# EAGLE board dlp.vco.dualosc.v1.1 (EAGLE 7.2.0)

Size 100 x 80 mm. Coordinates in mm from the lower left corner, seen from the top.
Outline: 0,0 100,0 100,80 0,80 0,0
Copper layers (1*16): Top 0.035mm / dielectric 1.5mm / Bottom 0.035mm
Design rules "default": minimum track width 10mil, minimum drill 24mil, track to track 8mil, track to pad 8mil, pad to pad 8mil, via to via 8mil, smd to smd 8mil, copper to edge 40mil, drill to drill 8mil, minimum pad ring 10mil, minimum via ring 8mil, stop-mask expansion 4mil, vias tented up to drill 0mil, thermal gap 10mil

## Footprints (pad centres in the part's own frame; a part is rotated, then mirrored left to right if it is on the bottom)
C025-024X044 = drill 0.813 octagon: 1 -1.27,0; 2 1.27,0
E2-5 = drill 0.813 pad 1.27: + -1.016,0 | drill 0.813 pad 1.27 octagon: - 1.016,0
DO35-7 = drill 0.813 long: A 3.81,0; C -3.81,0
R-VAR = drill 0.8 square: R1 -2.54,0; R2 2.54,0; VAR 0,0
RTRIM3296Y = drill 0.61: 1 1.27,-2.54; 2 -1.27,0; 3 1.27,2.54
DIL14 = drill 0.813 long: 1 -7.62,-3.81; 2 -5.08,-3.81; 3 -2.54,-3.81; 4 0,-3.81; 5 2.54,-3.81; 6 5.08,-3.81; 7 7.62,-3.81; 8 7.62,3.81; 9 5.08,3.81; 10 2.54,3.81; 11 0,3.81; 12 -2.54,3.81; 13 -5.08,3.81; 14 -7.62,3.81
JACK-M = drill 0.8 square: GND -3.81,0; HOT 3.81,0
2X08 = drill 1.016 octagon: 1 -8.89,-1.27; 2 -8.89,1.27; 3 -6.35,-1.27; 4 -6.35,1.27; 5 -3.81,-1.27; 6 -3.81,1.27; 7 -1.27,-1.27; 8 -1.27,1.27; 9 1.27,-1.27; 10 1.27,1.27; 11 3.81,-1.27; 12 3.81,1.27; 13 6.35,-1.27; 14 6.35,1.27; 15 8.89,-1.27; 16 8.89,1.27
2X10 = drill 1.016 octagon: 1 -11.43,-1.27; 2 -11.43,1.27; 3 -8.89,-1.27; 4 -8.89,1.27; 5 -6.35,-1.27; 6 -6.35,1.27; 7 -3.81,-1.27; 8 -3.81,1.27; 9 -1.27,-1.27; 10 -1.27,1.27; 11 1.27,-1.27; 12 1.27,1.27; 13 3.81,-1.27; 14 3.81,1.27; 15 6.35,-1.27; 16 6.35,1.27; 17 8.89,-1.27; 18 8.89,1.27; 19 11.43,-1.27; 20 11.43,1.27
TO92 = drill 0.813 long: 1 -2.54,-1.27; 2 0,-1.27; 3 2.54,-1.27
0309/10 = drill 0.813 octagon: 1 -5.08,0; 2 5.08,0

## Placement (x,y rotation side)
C1  0.01μF  [C025-024X044]  72.39,67.31 180 top
C2  18pF  [C025-024X044]  31.75,38.1 270 top
C3  100pF  [C025-024X044]  59.69,55.88 90 top
C5  10μF  [E2-5]  34.29,54.61 180 top
C6  10μF  [E2-5]  41.91,49.53 180 top
C14  0.1uF  [C025-024X044]  67.31,63.5 0 top
C15  0.1uF  [C025-024X044]  67.31,60.96 0 top
C16  0.01uF  [C025-024X044]  44.45,68.58 90 top
C17  0.01uF  [C025-024X044]  41.91,68.58 90 top
C18  0.1uF  [C025-024X044]  67.31,58.42 0 top
C19  10uF  [E2-5]  81.28,54.61 270 top
C20  0.1uF  [C025-024X044]  80.01,48.26 180 top
C21  0.1uF  [C025-024X044]  80.01,45.72 180 top
C22  0.01uF  [C025-024X044]  43.18,72.39 0 top
C23  0.01uF  [C025-024X044]  43.18,74.93 0 top
C24  0.1uF  [C025-024X044]  80.01,43.18 180 top
C25  10uF  [E2-5]  80.01,38.1 180 top
D1  1N4148  [DO35-7]  80.01,63.5 180 top
D2  1N4148  [DO35-7]  55.88,62.23 180 top
EXP.ATT1  250K (lin)  [R-VAR]  -59.69,34.29 0 top  (outside the outline)
HF-TRIM1  1M  [RTRIM3296Y]  48.26,54.61 0 top
IC1  NTE912P  [DIL14]  64.77,24.13 270 top
IC2  TL074P  [DIL14]  48.26,27.94 0 top
IC3  TL074P  [DIL14]  27.94,27.94 180 top
J1  PWM IN1  [JACK-M]  -20.32,36.83 0 top  (outside the outline)
J4  EXP.IN1  [JACK-M]  -34.29,36.83 0 top  (outside the outline)
J6  OSC OUT1  [JACK-M]  -48.26,36.83 0 top  (outside the outline)
JP1  PWR  [2X08]  5.08,45.72 90 top
JP2  PANEL  [2X10]  13.97,48.26 90 top
JP3  PANEL  [2X10]  -53.34,17.78 0 top  (outside the outline)
PWM1  250K (lin)  [R-VAR]  -74.93,34.29 0 top  (outside the outline)
PWM.ATT1  250K (lin)  [R-VAR]  -67.31,34.29 0 top  (outside the outline)
Q1  2N3417  [TO92]  87.63,67.31 270 top
Q2  2N3417  [TO92]  78.74,68.58 0 top
Q3  2N3906  [TO92]  78.74,60.96 0 top
R1  10K  [0309/10]  81.28,72.39 0 top
R2  100K  [0309/10]  40.64,38.1 180 top
R3  3.3M  [0309/10]  35.56,45.72 270 top
R4  10K  [0309/10]  24.13,52.07 180 top
R5  4.7K  [0309/10]  55.88,53.34 270 top
R6  100K  [0309/10]  63.5,49.53 270 top
R7  1K  [0309/10]  24.13,59.69 0 top
R8  390  [0309/10]  54.61,64.77 180 top
R9  47K  [0309/10]  54.61,67.31 0 top
R10  1.5M  [0309/10]  72.39,54.61 0 top
R11  10K  [0309/10]  24.13,57.15 180 top
R12  2.2K  [0309/10]  24.13,44.45 0 top
R13  100K  [0309/10]  -19.05,76.2 0 top  (outside the outline)
R14  100K  [0309/10]  -31.75,76.2 0 top  (outside the outline)
R15  100K  [0309/10]  -44.45,76.2 0 top  (outside the outline)
R16  100K  [0309/10]  -57.15,76.2 0 top  (outside the outline)
R17  22K  [0309/10]  24.13,49.53 180 top
R18  22K  [0309/10]  24.13,54.61 180 top
R45  10K  [0309/10]  46.99,44.45 270 top
SQ-LEVEL1  50K (log)  [R-VAR]  -16.51,41.91 0 top  (outside the outline)
SW-LEVEL1  50K (log)  [R-VAR]  -24.13,41.91 0 top  (outside the outline)
TUNE1  250K (lin)  [R-VAR]  -31.75,41.91 0 top  (outside the outline)
V/OCT1  100  [RTRIM3296Y]  44.45,63.5 90 top

## Library data of the parts
C1-C3 C5 C6 C14-C25 D1 D2 EXP.ATT1 IC1-IC3 J1 J4 J6 PWM1 PWM.ATT1 Q1-Q3 R1-R18 R45 SQ-LEVEL1 SW-LEVEL1 TUNE1 = _common
HF-TRIM1 V/OCT1 = rcl
JP1-JP3 = pinhead

## Nets
0V: C1.2 C14.2 C15.2 C16.2 C17.2 C18.2 C19.- C20.1 C21.1 C22.1 C23.1 C24.1 C25.+ IC1.4 IC2.3 IC2.5 IC3.3 IC3.5 JP1.3 JP1.4 JP1.5 JP1.6 JP1.7 JP1.8 JP2.3 JP2.4 R1.1 R6.2 R8.1
+12V: C14.1 C15.1 C16.1 C17.1 C18.1 C19.+ IC2.4 IC3.4 JP1.9 JP1.10 JP2.5 JP2.6 Q3.3 R10.2
-12V: C20.2 C21.2 C22.2 C23.2 C24.2 C25.- IC2.11 IC3.11 JP1.1 JP1.2 JP2.1 JP2.2
N$1: C1.1 IC1.5 IC2.10 Q2.1
N$2: Q2.2 Q3.2
N$3: D1.A Q3.1
N$4: C6.+ IC2.8 IC2.9 R2.1
N$5: D1.C Q1.2 Q1.3 Q2.3
N$6: Q1.1 R1.2
N$7: C2.1 IC2.12 R2.2 R3.2
N$8: IC2.13 R45.1
N$9: C2.2 C5.+ IC2.14 R3.1
N$10: PWM.ATT1.VAR R13.1
N$12: IC1.3 R5.2
N$13: D2.C R9.2
N$14: R8.2 V/OCT1.1
N$15: C3.1 IC1.1 IC2.6 R6.1 R10.1
N$16: D2.A IC1.2 IC2.1 R12.2 V/OCT1.2 V/OCT1.3
N$17: HF-TRIM1.3 R9.1
N$18: IC3.10 R4.1 R11.1
N$19: PWM1.VAR R16.1
N$20: IC3.8 IC3.9 R7.2
N$23: EXP.ATT1.VAR R14.1
N$24: R15.1 TUNE1.VAR
N$25: J1.HOT PWM.ATT1.R1
N$26: EXP.ATT1.R1 J4.HOT
N$27: IC3.13 IC3.14 R45.2
N$29: C6.- R17.1
N$30: C5.- R18.1
N$37: C3.2 HF-TRIM1.1 HF-TRIM1.2 IC2.7 R5.1
N$EXP1: IC2.2 JP2.7 R12.1
N$OSC.OUT1: JP2.19 R7.1
N$PNL.0V: EXP.ATT1.R2 J1.GND J4.GND J6.GND JP3.3 PWM1.R2 PWM.ATT1.R2
N$PNL.EXP1: JP3.7 R14.2 R15.2
N$PNL.N12V: JP3.1 TUNE1.R2
N$PNL.OSC.OUT1: J6.HOT JP3.19
N$PNL.P12V: JP3.5 PWM1.R1 TUNE1.R1
N$PNL.PWM1: JP3.9 R13.2 R16.2
N$PNL.SQ.LVL1A: JP3.15 SQ-LEVEL1.R1
N$PNL.SQ.LVL1B: JP3.17 SQ-LEVEL1.R2 SQ-LEVEL1.VAR
N$PNL.SW.LVL1A: JP3.11 SW-LEVEL1.R2
N$PNL.SW.LVL1B: JP3.13 SW-LEVEL1.R1 SW-LEVEL1.VAR
N$PWM1: IC3.12 JP2.9
N$SQ.LVL1A: IC3.6 JP2.15 R18.2
N$SQ.LVL1B: IC3.7 JP2.17 R11.2
N$SW.LVL1A: IC3.2 JP2.11 R17.2
N$SW.LVL1B: IC3.1 JP2.13 R4.2

## Tracks (layer width: path | path; a pad name or v marks a point on that pad's centre or on a via)
0V  (28 unrouted)
+12V  (13 unrouted)
-12V  (11 unrouted)
N$1  (3 unrouted)
N$2  (1 unrouted)
N$3  (1 unrouted)
N$4  (3 unrouted)
N$5  (3 unrouted)
N$6  (1 unrouted)
N$7  (3 unrouted)
N$8  (1 unrouted)
N$9  (3 unrouted)
N$10  (1 unrouted)
N$12  (1 unrouted)
N$13  (1 unrouted)
N$14  (1 unrouted)
N$15  (4 unrouted)
N$16  (5 unrouted)
N$17  (1 unrouted)
N$18  (2 unrouted)
N$19  (1 unrouted)
N$20  (2 unrouted)
N$23  (1 unrouted)
N$24  (1 unrouted)
N$25  (1 unrouted)
N$26  (1 unrouted)
N$27  (2 unrouted)
N$29  (1 unrouted)
N$30  (1 unrouted)
N$37  (4 unrouted)
N$EXP1  (2 unrouted)
N$OSC.OUT1  (1 unrouted)
N$PNL.0V  (6 unrouted)
N$PNL.EXP1  (2 unrouted)
N$PNL.N12V  (1 unrouted)
N$PNL.OSC.OUT1  (1 unrouted)
N$PNL.P12V  (2 unrouted)
N$PNL.PWM1  (2 unrouted)
N$PNL.SQ.LVL1A  (1 unrouted)
N$PNL.SQ.LVL1B  (2 unrouted)
N$PNL.SW.LVL1A  (1 unrouted)
N$PNL.SW.LVL1B  (2 unrouted)
N$PWM1  (1 unrouted)
N$SQ.LVL1A  (2 unrouted)
N$SQ.LVL1B  (2 unrouted)
N$SW.LVL1A  (2 unrouted)
N$SW.LVL1B  (2 unrouted)